# Altium PCB SensorTag.PcbDoc
Units mm, origin at the board's own origin, x right, y up, seen from the top; angles counter-clockwise.
Board outline 72.01 x 30.73 mm, 4 copper layers (Top Layer, VCC_3V3, VCC_1V2, Bottom Layer), stack 0.603 mm thick; 57 components, 52 nets, 238 pads, 130 vias.
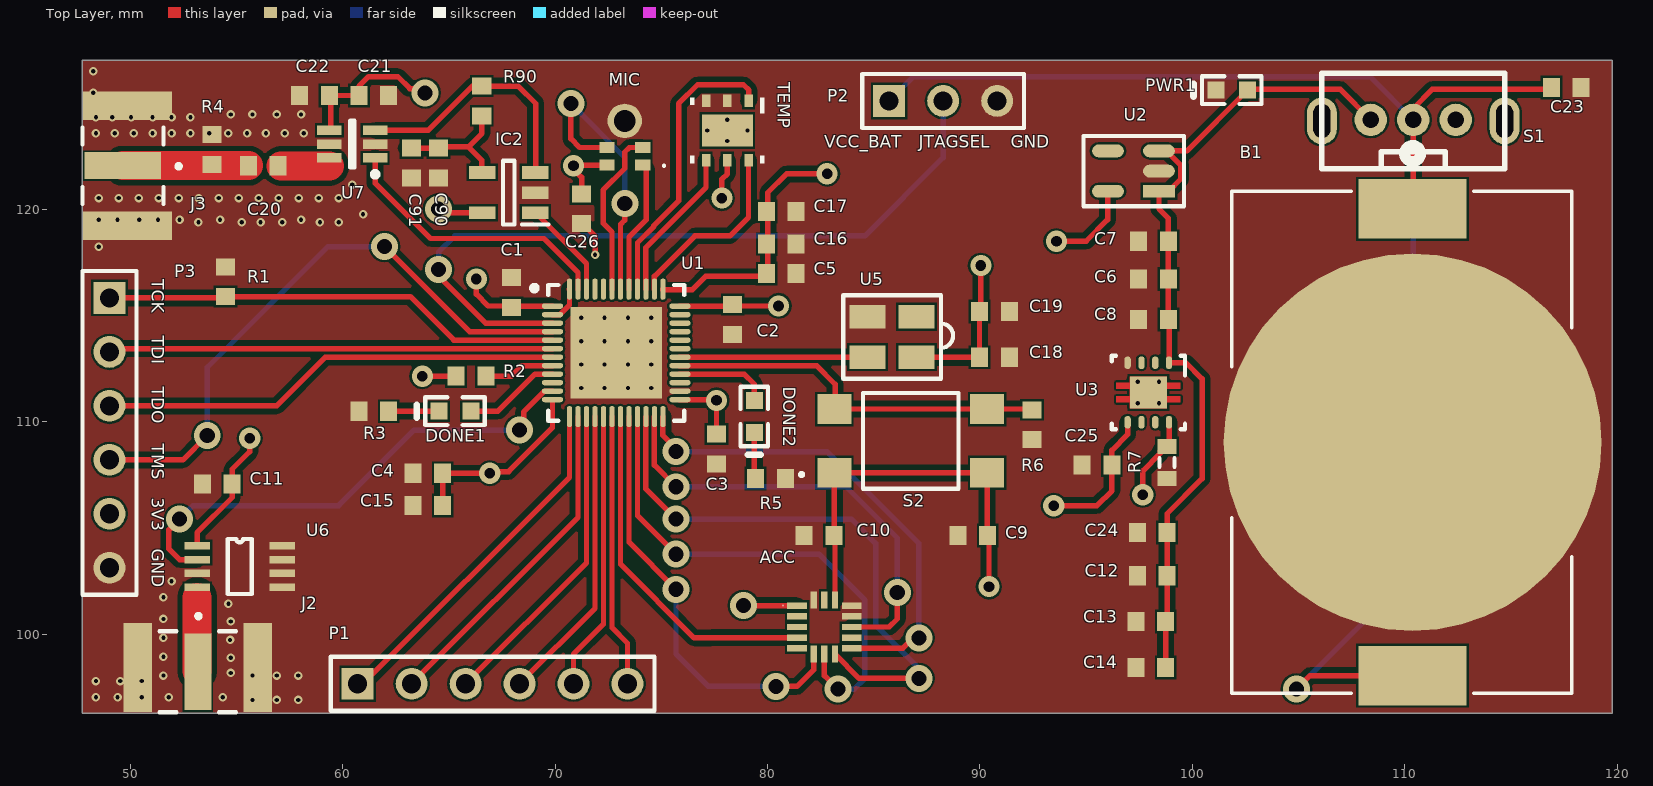
[diagram p0: Top Layer view]
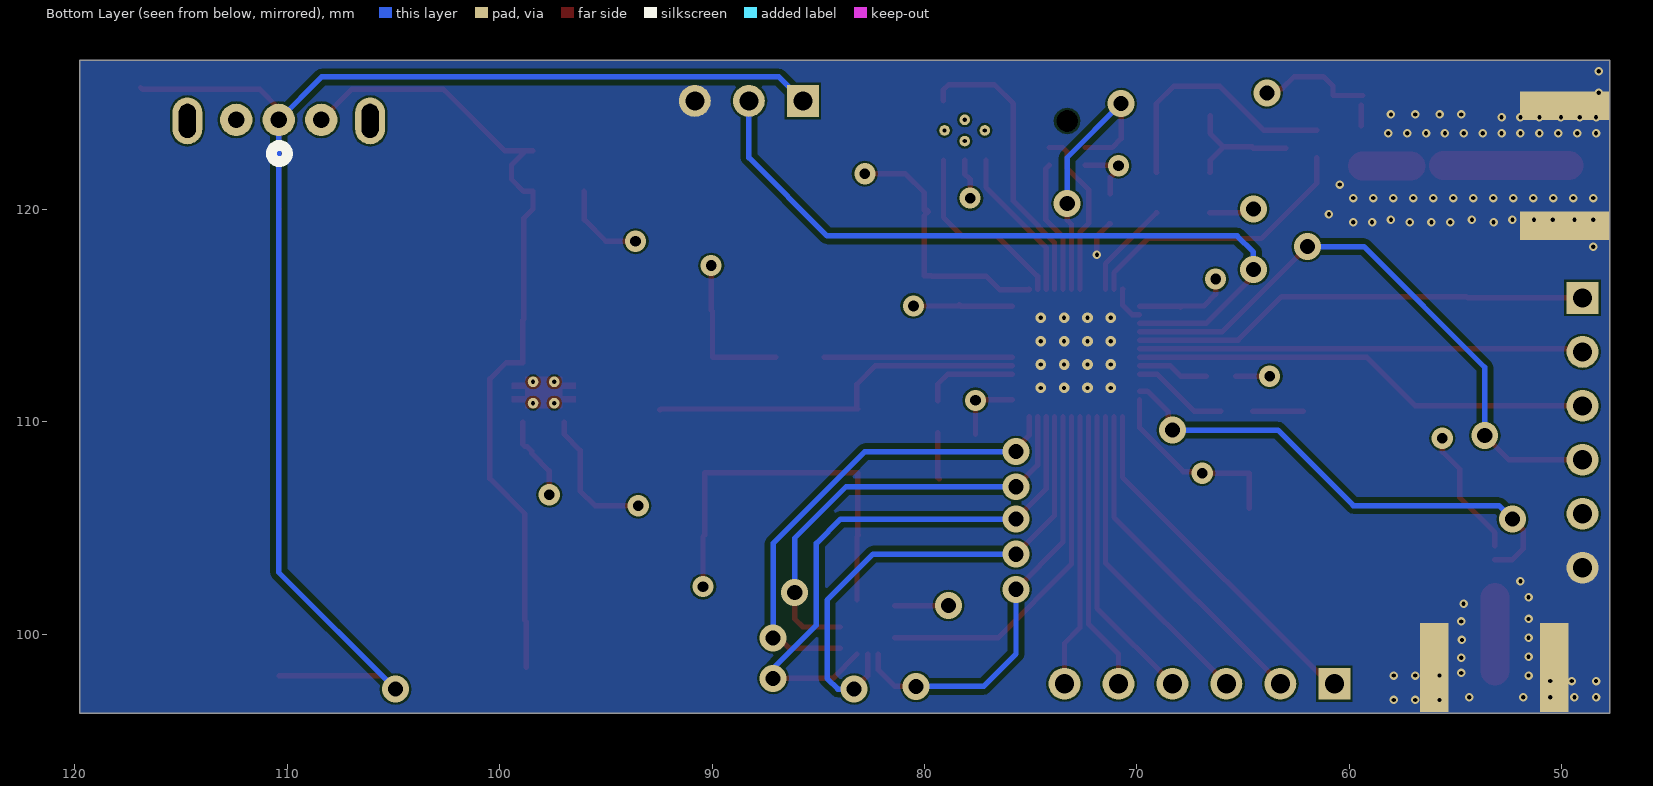
[diagram p1: Bottom Layer view, seen from below]
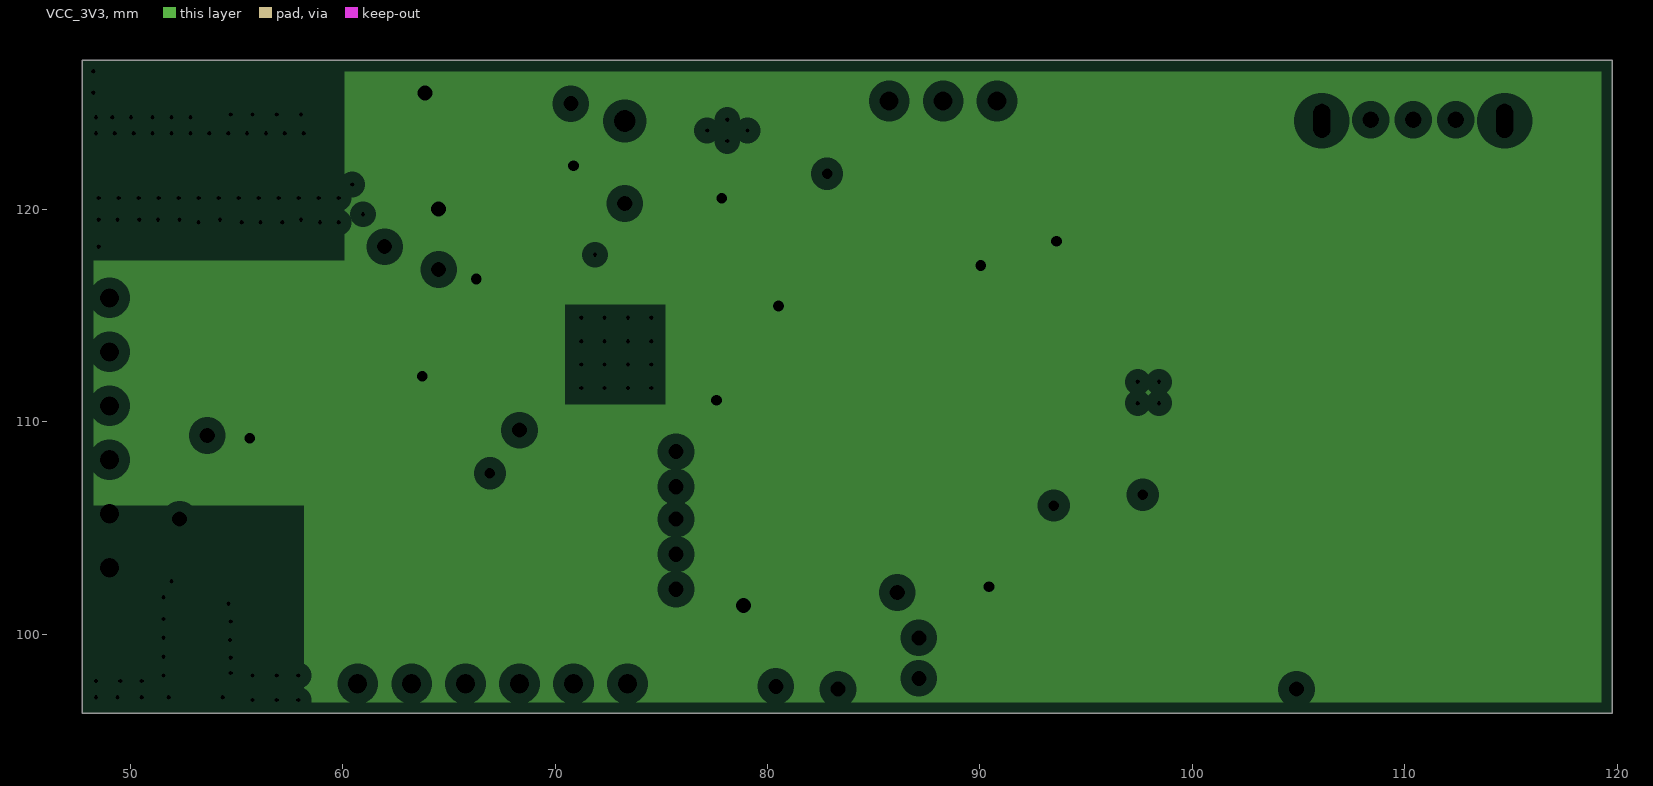
[diagram p2: VCC_3V3, clearances drawn from the general rule]
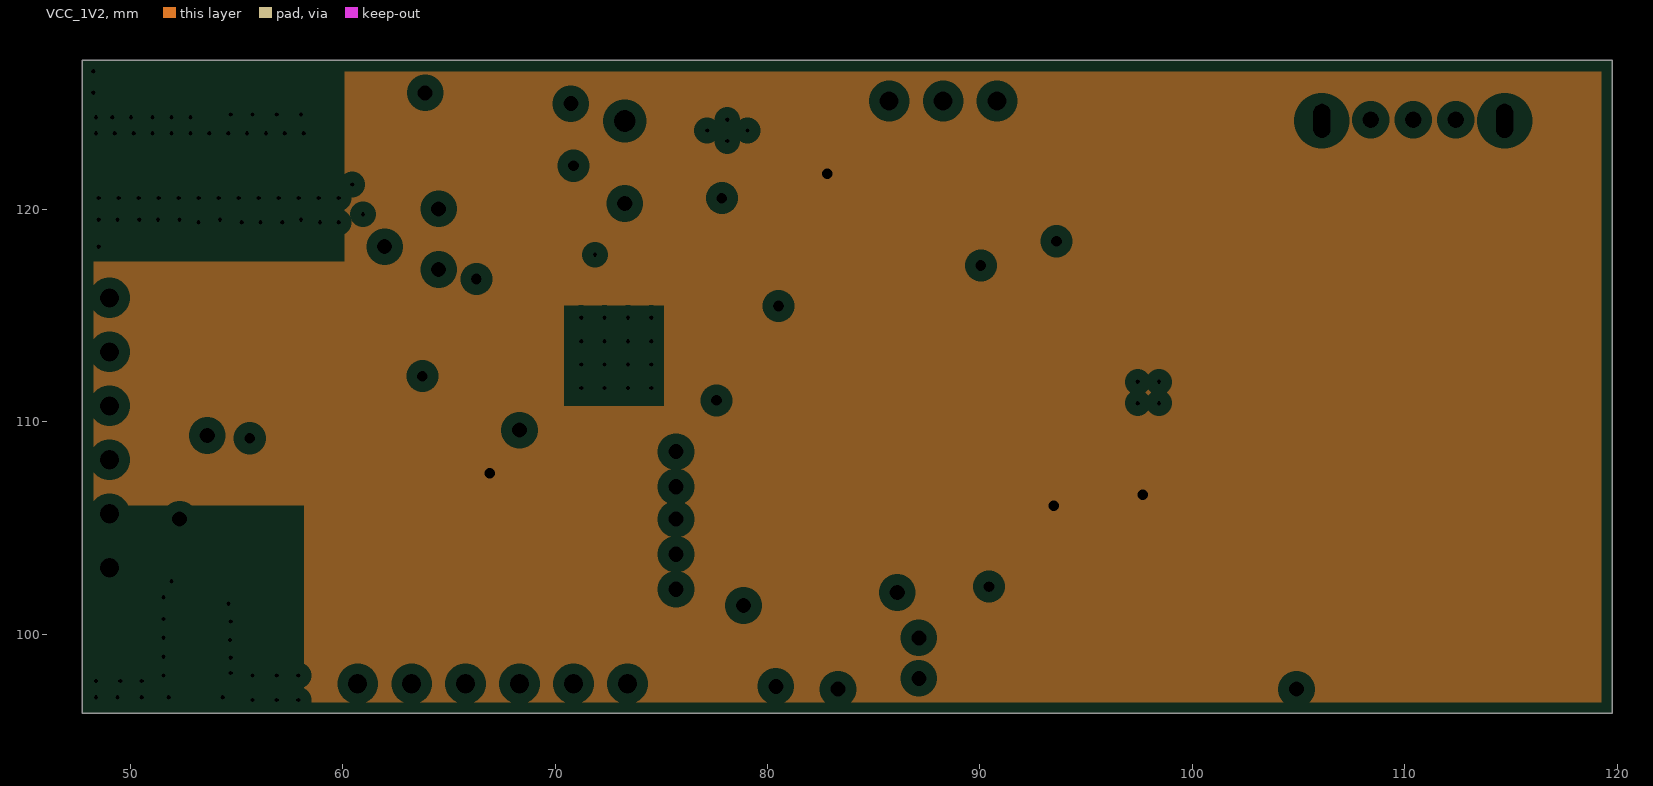
[diagram p3: VCC_1V2, clearances drawn from the general rule]

## Layer stack, top to bottom
Top Solder: solder mask 0.0102, Solder Resist, Dk 3.5
Top Layer: signal copper 0.0356
Dielectric 1: prepreg 0.0711, FR-4, Dk 4.1
VCC_3V3: plane copper 0.035, net 3V3
Dielectric 2: dielectric 0.32, FR-4, Dk 4.8
VCC_1V2: plane copper 0.035, net 1V2
Dielectric 3: prepreg 0.0711, FR-4, Dk 4.1
Bottom Layer: signal copper 0.0356
Bottom Solder: solder mask 0.0102, Solder Resist, Dk 3.5

## Board outline
47.752,127 47.752,96.266 119.761,96.266 119.761,127

## Design rules (kind name [scope] priority, off if disabled: settings)
Clearance [All] p1: gap=0.254 ignorepadtopadclearanceinfootprint=FALSE except(0: Arc-THPad Arc-Via Arc-Hole Track-SMDPad Track-Hole SMDPad-SMDPad SMDPad-Via SMDPad-Hole THPad-Via THPad-Hole Via-Via Via-Region Via-Hole Fill-Hole Poly-Text Poly-Hole Region-Region Region-Hole Text-Hole; 0.1: Arc-Poly Track-Track SMDPad-Poly THPad-Poly Via-Poly Poly-Poly Poly-Region; 0.2: SMDPad-THPad)
ComponentClearance [All] p1 off: gap=0.254 collisioncheckmode=3 verticalgap=0.254 showdistances=FALSE
PlaneClearance [All] p1: clearance=0.508
PlaneConnect [All] p1: planeconnectstyle=Direct reliefexpansion=0.508 reliefentries=4 reliefconductorwidth=0.254 reliefairgap=0.254
PolygonConnect [All] p1: connectstyle=Direct reliefconductorwidth=0.254 reliefentries=4 polygonreliefangle="90 Angle" airgapwidth=0.254
RoutingVias [All] p1: holewidth=0.711 width=1.27 viastyle="Through Hole" minholewidth=0.711 minwidth=1.27 maxholewidth=0.711 maxwidth=1.27
ShortCircuit [All] p1: allowed=TRUE
SolderMaskExpansion [All] p1: expansion=0.102 istentingtop=FALSE
Width [All] p1: maxlimit=10 minlimit=0.254 preferedwidth=0.254
26 further rules are at their usual default settings.

## Classes and differential pairs
component class power: ACC C18 C19 C20 C21 C22 C90 C91 DONE2 IC2 J2 J3 P3 R4 R5 R6 R90 S2 U5 U6 U7
component class io_bank: B1 C1 C2 C3 C4 C5 C6 C7 C8 C9 C10 C11 C12 C13 C14 C15 C16 C17 C23 C24 C25 C26 DONE1 Mic MIC P1 P2 PWR1 R1 R2 R3 R7 S1 TEMP U1 U2 U3

## Components (designator, comment, footprint, x,y, rotation, side; value= is the part's Value field where it differs from the comment)
ACC "ADXL362BCCZ-RL" ADXL362BCCZRL 82.677,100.33 r0 top (schematic designator AC1)
B1 "BK-912-TR" BK-912-TR_MPD 109.854,109.03 r270 top
C1 "0.1μF" 1608[0603] 67.945,116.078 r270 top value=100pF
C2 "0.1μF" 1608[0603] 78.359,114.808 r90 top value=100pF
C3 "0.1μF" 1608[0603] 77.597,108.712 r90 top value=100pF
C4 "4.7μF" 1608[0603] 64.008,107.569 r0 top value=100pF
C5 "4.7μF" 1608[0603] 80.645,116.967 r180 top value=100pF
C6 "10μF" 1608[0603] 98.171,116.713 r0 top value=100pF
C7 "0.1μF" 1608[0603] 98.171,118.491 r0 top value=100pF
C8 "0.01μF" 1608[0603] 98.171,114.808 r0 top value=100pF
C9 "0.01μF" 1608[0603] 89.662,104.648 r0 top value=100pF
C10 "0.1μF" 1608[0603] 82.423,104.648 r0 top value=100pF
C11 "10μF" 1608[0603] 54.102,107.061 r0 top value=100pF
C12 "10μF" 1608[0603] 98.106,102.743 r0 top value=100pF
C13 "0.1μF" 1608[0603] 98.044,100.584 r0 top value=100pF
C14 "0.01μF" 1608[0603] 98.044,98.425 r0 top value=100pF
C15 "0.1μF" 1608[0603] 64.008,106.045 r0 top value=100pF
C16 "0.01μF" 1608[0603] 80.645,118.364 r180 top value=100pF
C17 "10μF" 1608[0603] 80.645,119.888 r180 top value=100pF
C18 "0.01μF" 1608[0603] 90.678,113.03 r180 top value=100pF
C19 "0.1μF" 1608[0603] 90.678,115.189 r180 top value=100pF
C20 "1nF" 1608[0603] 56.261,122.047 r180 top
C21 "100nF" 1608[0603] 61.468,125.349 r180 top
C22 "10nF" 1608[0603] 58.674,125.349 r0 top
C23 "Cap" 1608[0603] 117.602,125.73 r180 top value=10uF
C24 "0.1μF" 1608[0603] 98.106,104.775 r0 top value=100pF
C25 "0.47μF" 1608[0603] 95.504,107.95 r0 top value=100pF
C26 "0.1μF" 1608[0603] 71.247,120.015 r90 top value=100pF
C90 "1nF" 1608[0603] 64.516,122.174 r270 top value=1pF
C91 "1nF" 1608[0603] 63.246,122.174 r270 top value=1pF
DONE1 "绿灯 0603" 0603_LED 65.29,110.49 r0 top
DONE2 "绿灯 0603" 0603_LED 79.375,110.236 r90 top
IC2 "NCS2200SN2T1G" SOT95P275X110-5N 67.818,120.777 r180 top
J2 "SMA-J-P-H-ST-EM1" SAMTEC_SMA-J-P-H-ST-EM1 53.182,98.225 r0 top
J3 "SMA-J-P-H-ST-EM1" SAMTEC_SMA-J-P-H-ST-EM1 49.657,122.047 r270 top
MIC "MMICT3902-00-012" MMICT390200012 73.279,123.444 r90 top (schematic designator IC1)
P1 "Header 6" HDR1X6 60.706,97.663 r0 top
P2 "Header 3" HDR1X3 85.725,125.095 r0 top
P3 "Header 6" HDR1X6 49.022,115.824 r270 top
PWR1 "红灯 0603" 0603_LED 101.854,125.603 r0 top
R1 "4.7k" 1608[0603] 54.483,116.586 r270 top value=1K
R2 "4.7k" 1608[0603] 66.04,112.141 r0 top value=1K
R3 "1k Ohm" 1608[0603] 61.468,110.49 r0 top value=1k
R4 "47 Ohm" 1608[0603] 53.848,122.809 r270 top value=47O
R5 "1k Ohm" 1608[0603] 80.137,107.315 r180 top value=1k
R6 "1k Ohm" 1608[0603] 92.456,109.855 r90 top value=1M
R7 "Res3" J1-0603 98.806,108.077 r270 top value=1M
R90 "47 Ohm" 1608[0603] 66.548,125.095 r90 top value=1MO
S1 "SW-SPDT" SW_SPDT 110.395,124.206 r180 top
S2 "TL3305AF160QG" TL3305AF160QG 86.741,109.093 r0 top
TEMP "HDC2080DMBR" DMB0006A 78.105,123.706 r270 top value=Value (schematic designator U4)
U1 "GW1N-LV4QN48C6" QFN40P600X600X60_HS-49N 72.876,113.236 r0 top
U2 "TPS73633" TPS73633 98.425,120.843 r180 top
U3 "TPS715A01DRBR" DRB0008A 97.925,111.371 r270 top
U5 "ASTX_H11_20MHz" ASTX_H11 87.009,114.935 r270 top
U6 "adg902" ADG902 53.15,104.155 r0 top
U7 "LT5534" LT5534 60.452,123.063 r180 top

## Footprints (in the part's own frame and the unit in brackets; to place one, negate y for a bottom-side part, rotate by r counter-clockwise, add the part's x,y. Pads: shape width x height; smd on the part's side, far side on the other; paste and mask are expansions set on the pad)
0603_LED [mm]
  rect 0.8x0.8 smd: A(0.75,0) K(-0.75,0)
  silkscreen extent -1.8,-0.65 1.4,0.65
1608[0603] [mm] "Chip Capacitor, Body 1.6x0.8mm, IPC High Density"
  rect 0.8x0.9 smd: 1(-0.7,0) 2(0.7,0)
  body extent -0.87,-0.48 0.87,0.48, height 1.3
ADG902 [mm]
  rect 1.2x0.35 smd: 1(0,0) 2(0,-0.65) 3(0,-1.3) 4(0,-1.95) 5(4,-1.95) 6(4,-1.3) 7(4,-0.65) 8(4,0)
  silkscreen extent 1.43,-2.28 2.57,0.33
ADXL362BCCZRL [mm]
  rect 0.925x0.3 smd: 1(-1.288,1) 2(-1.288,0.5) 3(-1.288,0) 4(-1.288,-0.5) 5(-1.288,-1) 9(1.288,-1) 10(1.288,-0.5) 11(1.288,0) 12(1.288,0.5) 13(1.288,1)
  rect 0.3x0.8 smd: 6(-0.5,-1.275) 7(0,-1.275) 8(0.5,-1.275) 14(0.5,1.275) 15(0,1.275) 16(-0.5,1.275)
  silkscreen extent -1.97,1.01 -1.94,1.03, body extent -1.72,-1.65 1.72,1.65, height 1.24
ASTX_H11 [mm]
  rect 1.1x1.7 smd: 1(0,0) 2(0,-2.3) 3(1.9,-2.3) 4(1.9,0)
  silkscreen extent -1.02,-3.45 2.92,1.72
BK-912-TR_MPD [mm]
  rect 2.794x5.08 smd paste+0 mask+0: 1(-10.985,0.509) 2(10.985,0.509)
  round 17.78 smd: 3(0,0.509)
  silkscreen extent -13.97,-8 11.81,8, body extent 0,0 0.25,0.25, height 0.25
DMB0006A [mm]
  rect 0.6x0.4 smd paste+0 mask+0: 1(-1.4,1) 2(-1.4,0) 3(-1.4,-1) 4(1.4,-1) 5(1.4,0) 6(1.4,1)
  rect 1.5x2.4 smd paste-1.187 mask+0: 7(0,0)
  round 0.5 hole 0.203 mask+0: V(-0.5,0) V(0,0.95) V(0,-0.95) V(0.5,0)
  silkscreen extent -1.55,-1.75 1.55,1.75, body extent 0,0 0.25,0.25, height 0.25
DRB0008A [mm]
  oval 0.6x0.3 smd paste+0 mask+0.051: 1(-1.4,0.975) 2(-1.4,0.325) 3(-1.4,-0.325) 4(-1.4,-0.975) 5(1.4,-0.975) 6(1.4,-0.325) 7(1.4,0.325) 8(1.4,0.975)
  rect 1.5x1.75 smd paste-0.862 mask+0.051: 9(0,0)
  round 0.5 hole 0.203 mask+0.051: V(-0.5,0.5) V(-0.5,-0.5) V(0.5,0.5) V(0.5,-0.5)
  Top Layer region: -0.185,-1.5 -0.465,-1.5 -0.465,-0.875 -0.75,-0.875 -0.75,0.875 -0.465,0.875 -0.465,1.5 -0.185,1.5 -0.185,0.875 0.185,0.875 0.185,1.5 0.465,1.5 0.465,0.875 0.75,0.875 0.75,-0.875 0.465,-0.875 0.465,-1.5 0.185,-1.5 0.185,-0.875 -0.185,-0.875
  silkscreen extent -1.73,-1.73 1.73,1.73, body extent 0,0 0.25,0.25, height 0.25
HDR1X3 [mm] "Connector; Header; 3 Position"
  rect 1.5x1.5 hole 0.9: 1(0,0)
  round 1.5 hole 0.9: 2(2.54,0) 3(5.08,0)
  silkscreen extent -1.27,-1.27 6.35,1.27
HDR1X6 [mm] "Connector; Header; 6 Position"
  rect 1.5x1.5 hole 0.9: 1(0,0)
  round 1.5 hole 0.9: 2(2.54,0) 3(5.08,0) 4(7.62,0) 5(10.16,0) 6(12.7,0)
  silkscreen extent -1.27,-1.27 13.97,1.27
J1-0603 [mm] "Chip Resistor, Body 1.6x0.8mm, IPC High Density"
  rect 0.7x0.9 smd: 1(-0.75,0) 2(0.75,0)
  silkscreen extent -0.2,-0.35 0.2,0.35, body extent -0.85,-0.48 0.85,0.48, height 0.9
LT5534 [mm] "SOT23, 6-Leads, Body 2.00x2.55mm, Pitch 0.65mm, IPC Medium Density"
  rect 1.15x0.45 smd: 1(-1.075,0.65) 2(-1.075,0) 3(-1.075,-0.65) 4(1.075,-0.65) 5(1.075,0) 6(1.075,0.65)
  silkscreen extent -1.2,-1.1 0.1,1.55, body extent -0.67,-1.1 0.67,1.1, height 1.1
MMICT390200012 [mm]
  rect 0.522x0.725 smd: 1(-1.364,-0.838) 2(-0.542,-0.838) 4(-0.542,0.837) 5(-1.364,0.837)
  round 1.625 smd: 3(0.71,0)
  round 0.512 hole 1.025 unplated: 6(0.71,0)
  silkscreen extent -1.45,-1.9 -1.35,-1.8, body extent -1.75,-1.33 1.75,1.33, height 1.23
QFN40P600X600X60_HS-49N [mm] "QFN, 48-Leads, Body 6.00x6.00mm, Pitch 0.40mm, Thermal Pad 4.63x4.63mm, IPC Medium Density"
  oval 1x0.25 smd: 1(-3,2.2) 2(-3,1.8) 3(-3,1.4) 4(-3,1) 5(-3,0.6) 6(-3,0.2) 7(-3,-0.2) 8(-3,-0.6) 9(-3,-1) 10(-3,-1.4) 11(-3,-1.8) 12(-3,-2.2) 25(3,-2.2) 26(3,-1.8) 27(3,-1.4) 28(3,-1) 29(3,-0.6) 30(3,-0.2) 31(3,0.2) 32(3,0.6) 33(3,1) 34(3,1.4) 35(3,1.8) 36(3,2.2)
  oval 0.25x1 smd: 13(-2.2,-3) 14(-1.8,-3) 15(-1.4,-3) 16(-1,-3) 17(-0.6,-3) 18(-0.2,-3) 19(0.2,-3) 20(0.6,-3) 21(1,-3) 22(1.4,-3) 23(1.8,-3) 24(2.2,-3) 37(2.2,3) 38(1.8,3) 39(1.4,3) 40(1,3) 41(0.6,3) 42(0.2,3) 43(-0.2,3) 44(-0.6,3) 45(-1,3) 46(-1.4,3) 47(-1.8,3) 48(-2.2,3)
  rect 4.3x4.3 smd: 49(0,0)
  silkscreen extent -3.97,-3.2 3.2,3.2, body extent -3.05,-3.05 3.05,3.05, height 0.6
SAMTEC_SMA-J-P-H-ST-EM1 [mm]
  rect 1.27x3.6 smd: 1(0,0)
  rect 1.35x4.2 smd: 2_1(-2.825,0.2) 3_1(2.825,0.2)
  rect 1.35x4.2 smd far side: 2_2(-2.825,0.2) 3_2(2.825,0.2)
  silkscreen extent -1.8,-1.9 1.8,2.72
SOT95P275X110-5N [mm]
  rect 1.25x0.6 smd: 1(-1.25,0.95) 2(-1.25,0) 3(-1.25,-0.95) 4(1.25,-0.95) 5(1.25,0.95)
  silkscreen extent -1.88,-1.5 0.28,1.5, body extent -1.38,-1.5 1.38,1.5, height 1.1
SW_SPDT [mm]
  oval 1.4x2.2 hole 0.8 slot 1.6 at 90 deg: 0(-4.3,0.05) 0(4.3,0.05)
  round 1.524 hole 0.762: 1(-2,0) 2(0,0) 3(2,0)
  silkscreen extent -4.3,-2.2 4.3,2.3, body extent -4.25,-1.9 4.25,1.8, height 6.5
TL3305AF160QG [mm]
  rect 1.6x1.4 smd: 1(-3.6,-1.5) 2(3.6,-1.5) 3(-3.6,1.5) 4(3.6,1.5)
  silkscreen extent -5.21,-2.25 2.25,2.25
TPS73633 [mm]
  rect 1.5x0.6 smd: 1(0,0)
  oval 1.5x0.6 smd: 2(0,-0.95) 3(0,-1.9) 4(2.4,-1.9) 5(2.4,0)
  silkscreen extent -1.17,-2.6 3.55,0.7

## Part data
ACC: "Accelerometer", Manufacturer_Name="Analog Devices", Mouser2 Part Number=584-ADXL362BCCZ-R, Datasheet Link=https://componentsearchengine.com//ADXL362BCCZ-RL.pdf, Height=1.14mm, Manufacturer_Part_Number=ADXL362BCCZ-RL, Mouser2 Price/Stock=https://www.mouser.com/Search/Refine.aspx?Keyword=584-ADXL362BCCZ-R
B1: "No Description Available", VALUE_2=Value, Built_By=EMA_Cory, Copyright="Copyright (C) 2018 Accelerated Designs. All rights reserved", Datasheet=https://www.memoryprotectiondevices.com/datasheets/BK-912-datasheet.pdf, Manufacturer_Part_Number=BK-912-TR, RefDes=RefDes, SourceLibrary=Memory_Protection_Devices_2020-01-22, Type=DEV, Vendor="Memory Protection Devices, Inc"
C1 C2 C3 C4 C5 C7 C10 C13 C15 C19 C24 C25 C26: library part CAP_2, "MLCCs", LatestRevisionDate=17-Jul-2002, LatestRevisionNote="Re-released for DXP Platform.", PackageDescription="Radial Cap, Thru-Hole; 2 Leads; 0.3 in Pin Spacing", PackageReference=RAD-0.3, Published=8-Jun-2000, Publisher="Altium Limited"
C6 C11 C12 C17: library part CAP_4, "MLCCs", LatestRevisionDate=17-Jul-2002, LatestRevisionNote="Re-released for DXP Platform.", PackageDescription="Radial Cap, Thru-Hole; 2 Leads; 0.3 in Pin Spacing", PackageReference=RAD-0.3, Published=8-Jun-2000, Publisher="Altium Limited"
C8 C9 C14 C16 C18: library part CAP_3, "MLCCs", LatestRevisionDate=17-Jul-2002, LatestRevisionNote="Re-released for DXP Platform.", PackageDescription="Radial Cap, Thru-Hole; 2 Leads; 0.3 in Pin Spacing", PackageReference=RAD-0.3, Published=8-Jun-2000, Publisher="Altium Limited"
C20 C21 C22 C90 C91: library part Cap, "Ceramic Capacitor (Surface Mount)", Manufacturer="Generic Ceramic Chip Cap (TBD)"
C23: "Capacitor", LatestRevisionDate=17-Jul-2002, LatestRevisionNote="Re-released for DXP Platform.", PackageDescription="Radial Cap, Thru-Hole; 2 Leads; 0.3 in Pin Spacing", PackageReference=RAD-0.3, Published=8-Jun-2000, Publisher="Altium Limited"
DONE1 DONE2: library part "0603 绿灯", "发光二极管", Package=0603, SuppliersPartNumber=C72043, ComponentLink1Description=供应商链接, ComponentLink1URL=http://www.szlcsc.com/product/details_73152.html, Supplier=LC
IC2: "Integrated Circuit", Manufacturer_Name="ON Semiconductor", Datasheet Link=http://www.onsemi.com/pub/Collateral/NCS2200-D.PDF, Height=1.1mm, Manufacturer_Part_Number=NCS2200SN2T1G
J2 J3: "SMA Connector Jack, Female Socket 50Ohm Board Edge, End Launch Solder", Package=None, Digi-Key_Part_Number=SAM8857-ND, MF=Samtec, MP=SMA-J-P-H-ST-EM1, SnapEDA_Link=https://www.snapeda.com/parts/SMA-J-P-H-ST-EM1/Samtec%20Inc./view-part/134500/?ref=snap, Toby_UK-Purchase-URL=https://snapeda.com/shop?store=Toby+UK&id=134500
MIC: "Integrated Circuit", Manufacturer_Name=TDK, Datasheet Link=http://invensense.tdk.com/wp-content/uploads/2020/05/DS-000357-T3902-v1.0.pdf, Height=1.13mm, Manufacturer_Part_Number=MMICT3902-00-012
P1 P3: "Header, 6-Pin", LatestRevisionDate=17-Jul-2002, LatestRevisionNote="Re-released for DXP Platform.", Publisher="Altium Limited"
P2: "Header, 3-Pin", LatestRevisionDate=17-Jul-2002, LatestRevisionNote="Re-released for DXP Platform.", Publisher="Altium Limited"
PWR1: library part "0603 红灯", "发光二极管", Package=0603, SuppliersPartNumber=C2286, ComponentLink1Description=供应商链接, ComponentLink1URL=http://www.szlcsc.com/product/details_2659.html, Supplier=LC
R1 R2: library part RES_1, "Resistor", LatestRevisionDate=17-Jul-2002, LatestRevisionNote="Re-released for DXP Platform.", PackageDescription="Axial Device, Thru-Hole; 2 Leads; 0.3 in Pin Spacing", PackageReference=AXIAL-0.3, Published=8-Jun-2000, Publisher="Altium Limited"
R3 R4 R5 R6 R90: library part Res, "Chip Resistor (Surface Mount)", Manufacturer="Generic Chip Res (TBD)"
R7: "Resistor", LatestRevisionDate=29-May-2009, LatestRevisionNote="IPC-7351 Footprint Added.", PackageDescription="Chip Resistor", PackageReference=J1-0603, Published=8-Jun-2000, Publisher="Altium Limited"
S1: "Single Pole Double Throw Subminiature Toggle Switch, Right Angle Mounting, Vertical Actuation", ComponentLink1Description="Manufacturer Link", ComponentLink1URL=http://www.apem.com, DatasheetDocument=05-Dec-2000, LatestRevisionDate=17-Dec-2003, LatestRevisionNote="Schematic revised, PCB Footprint replaced.", PackageReference=TL36WW15050, Published=24-Mar-1999, Publisher="Altium Limited"
S2: "Switch", Manufacturer_Name=E-Switch, Mouser2 Part Number=612-TL3305AF160QG, Datasheet Link=https://componentsearchengine.com//TL3305AF160QG.pdf, Manufacturer_Part_Number=TL3305AF160QG, Mouser2 Price/Stock=https://www.mouser.com/Search/Refine.aspx?Keyword=612-TL3305AF160QG
TEMP: "No Description Available", Manufacturer="Texas Instruments", Copyright="Copyright (C) 2018 Accelerated Designs. All rights reserved", PartNumber=HDC2080DMBR, RefDes=RefDes, Type=DEV
U3: "No Description Available", Alternate_PartNumber=TPS715A01DRBT, Manufacturer="Texas Instruments", CompType=IC, Copyright="Copyright (C) 2021 Ultra Librarian. All rights reserved.", Manufacturer_Part_Number=TPS715A01DRBR, Mfr_Name="Texas Instruments", MountType=SMT, PackageReference=DRB0008A, PartNumber=TPS715A01DRBR, RefDes=RefDes, RoHS=Y, Type=DEV
U7: library part LT55534

## Via types
v1: diameter 0.4, hole 0.2, Top Layer to Bottom Layer, 79 vias
v2: diameter 1.27, hole 0.711, Top Layer to Bottom Layer, 21 vias
v3: diameter 0.5, hole 0.2, Top Layer to Bottom Layer, 16 vias
v4: diameter 1, hole 0.5, Top Layer to Bottom Layer, 14 vias

## Nets (pads, with @x,y where several pads share a name; then routed paths per layer and width w, separated by ;. In a path a pad name is that pad's centre, name@x,y a point inside that pad or via, vN(x,y) a via of type N, cw(c..) or ccw(c..) an arc to the next point about the centre after c; other vN are vias at no path point)
1V2: C4.2 C5.2 C15.2 C16.2 C17.2 C25.2 R7.1 U1.12 U1.37 U3.5 U3.8 | length 32.1
  Top Layer w0.254: C15.2@64.708,105.918 C15.2 C4.2 v4(66.929,107.569) 67.008,107.648 67.81,107.648 69.876,109.714 U1.12 ; U1.37 75.076,116.207 75.078,116.205 76.454,116.205 77.089,116.84 79.655,116.84 79.686,116.871 79.94,116.859 80.01,116.855 80.01,119.696 79.818,119.888 C17.2@79.881,119.951 ; C17.2 80.01,119.953 80.01,120.777 80.899,121.666 v4(82.804,121.666) ; v4(93.472,106.045) 95.504,106.045 96.204,106.745 C25.2 96.204,108.65 96.95,109.396 U3.5 ; v4(97.663,106.553) 97.663,107.684 98.483,108.504 98.483,108.604 98.706,108.827 R7.1 98.9,108.921 U3.8
3V3: ACC.1 ACC.14 C1.2 C2.2 C3.2 C9.2 C10.2 C11.2 C18.2 C19.2 C21.2 C22.2 C26.2 IC2.5 MIC.5 P3.5 R2.1 S2.1 S2.2 TEMP.5 U1.1 U1.25 U1.36 U2.5 U5.4 U6.1 U7.4 | length 66.5
  Top Layer w0.254: U6.1 53.15,104.781 54.802,106.433 C11.2 54.802,107.761 55.626,108.585 v4(55.626,109.22) ; C22.2 C21.2 60.768,125.792 61.214,126.238 62.592,126.238 63.16,125.67 63.687,125.67 v2(63.881,125.476) ; U7.4@59.436,123.931 C22.2@59.436,124.906 ; v4(63.754,112.141) R2.1 ; v2(64.516,120.015) 64.704,119.827 IC2.5 ; v4(66.294,116.713) 66.294,115.999 66.85,115.443 67.88,115.443 C1.2 68.003,115.436 U1.1 ; v4@70.833,122.014 v4(70.866,122.047) ; C26.2 71.247,121.496 70.866,121.877 v4(70.866,122.047) ; MIC.5 72.425,122.063 70.882,122.063 v4(70.866,122.047) ; U1.25 75.878,111.034 77.561,111.034 v4(77.597,110.998) C3.2 ; U1.36 78.287,115.436 C2.2 78.424,115.443 v4(80.518,115.443) ; v4(77.851,120.523) 77.851,121.412 78.105,121.666 TEMP.5 ; v2(78.867,101.346) 78.875,101.338 81.381,101.338 ACC.1 ; ACC.14 83.177,104.594 C10.2 83.141,104.666 S2.1 S2.2 90.341,104.669 C9.2 90.424,104.586 v4(90.424,102.235) ; U5.4 87.014,113.03 C18.2 C19.2 90.043,115.254 v4(90.043,117.348) ; v4(93.599,118.491) 94.996,118.491 96.012,119.507 96.012,120.83 U2.5
GND: ACC.12 ACC.13 ACC.16 B1.3 C1.1 C2.1 C3.1 C4.1 C5.1 C6.1 C7.1 C8.1 C9.1 C10.1 C11.1 C12.1 C13.1 C14.1 C15.1 C16.1 C17.1 C18.1 C19.1 C21.1 C22.1 C23.1 C24.1 C25.1 C26.1 C90.2 C91.2 IC2.2 J2.2_1 J2.2_2 J2.3_1 J2.3_2 J3.2_1 J3.2_2 J3.3_1 J3.3_2 MIC.3 P2.3 P3.6 PWR1.K R1.1 R3.1 R4.1 R5.1 R6.1 R7.2 TEMP.2 TEMP.3 U1.2 U1.26 U1.48 U1.49 U2.2 U3.4 U5.2 U6.3 U6.5 U6.6 U6.7 U6.8 U7.2 U7.5 | length 3.5
  Top Layer w0.254: U1.2 70.224,115.036 70.676,115.488 U1.48 U1.48@70.674,116.238 ; C26.1 71.297,119.315 71.882,118.73 v1(71.882,117.856)
  other v1: 55.754,96.901 56.897,96.901 57.913,96.901 48.387,97.028 49.403,97.028 50.546,97.028 51.816,97.028 54.356,97.028 48.387,97.79 49.53,97.79 50.546,97.79 51.562,98.044 55.754,98.044 56.897,98.044 57.913,98.044 54.737,98.171 54.728,98.886 51.562,98.933 54.702,99.721 51.562,99.822 54.728,100.595 51.562,100.711 54.622,101.43 51.562,101.727 51.943,102.489 48.515,118.237 53.213,119.38 55.245,119.38 56.134,119.38 57.15,119.38 58.928,119.38 59.817,119.38 48.514,119.507 49.403,119.507 50.419,119.507 51.308,119.507 52.324,119.507 54.229,119.507 58.039,119.507 60.96,119.761 48.514,120.523 49.456,120.523 50.398,120.523 51.34,120.523 52.282,120.523 53.224,120.523 54.165,120.523 55.107,120.523 56.049,120.523 56.991,120.523 57.933,120.523 58.875,120.523 59.817,120.523 60.452,121.158 48.387,123.571 49.276,123.571 50.165,123.571 51.054,123.571 51.943,123.571 52.832,123.571 53.721,123.571 54.61,123.571 55.499,123.571 56.388,123.571 57.277,123.571 58.166,123.571 48.387,124.333 49.149,124.333 50.038,124.333 51.054,124.333 51.943,124.333 52.832,124.333 54.737,124.46 55.753,124.46 56.896,124.46 58.039,124.46 48.261,125.476 48.261,126.492
  other v3: 71.226,111.586 72.326,111.586 73.426,111.586 74.526,111.586 71.226,112.686 72.326,112.686 73.426,112.686 74.526,112.686 71.226,113.786 72.326,113.786 73.426,113.786 74.526,113.786 71.226,114.886 72.326,114.886 73.426,114.886 74.526,114.886
JTAGSEL3N: P2.2 U1.3 | length 35.7
  Top Layer w0.254: v2(64.516,117.161) 64.516,116.847 66.727,114.636 U1.3
  Bottom Layer w0.254: v2(64.516,117.161) 64.516,117.983 65.278,118.745 84.582,118.745 88.265,122.428 P2.2
NetC20_1: C20.1 U7.6 | length 2.3
  Top Layer w0.254: C20.1@57.088,122.047 C20.1@57.103,122.032
  Top Layer w1.37: C20.1@57.103,122.032 59.377,122.032
NetC20_2: C20.2 J3.1 R4.2 | length 6
  Top Layer w0.254: C20.2@55.626,122.109 C20.2@55.688,122.047
  Top Layer w1.37: J3.1 C20.2
NetC90_1: C90.1 C91.1 IC2.4 R90.1 | length 6.1
  Top Layer w0.254: C91.1@62.992,122.874 C91.1 C90.1 64.578,122.936 65.913,122.936 ; R90.1 66.548,123.571 65.913,122.936 ; IC2.4 66.548,121.747 66.548,122.301 65.913,122.936
NetDONE1_A: DONE1.A U1.9 | length 4.6
  Top Layer w0.254: DONE1.A 67.31,110.49 69.056,112.236 U1.9
NetDONE1_K: DONE1.K R3.2 | length 2.4
  Top Layer w0.254: R3.2 DONE1.K
NetDONE2_K: DONE2.K R5.2 | length 2.2
  Top Layer w0.254: R5.2@79.31,107.315 79.375,107.38 DONE2.K
NetIC2_3: IC2.3 R90.2 U7.3 | length 12
  Top Layer w0.254: U7.3 64.023,123.713 66.105,125.795 R90.2 68.261,125.795 69.088,124.968 69.088,121.747 IC2.3
NetJ2_1: J2.1 U6.4 | length 3.5
  Top Layer w0.254: J2.1@53.15,98.257 J2.1
  Top Layer w1.37: J2.1@53.15,98.257 53.15,101.727
NetR2_2: R2.2 U1.8 | length 3.3
  Top Layer w0.254: R2.2 67.945,112.141 68.44,112.636 U1.8
PIN10: U1.10
PIN11: U1.11 U6.2 | length 23.6
  Top Layer w0.254: v2(52.324,105.41) 51.816,104.902 51.816,104.013 52.324,103.505 U6.2 ; v2(68.326,109.601) 68.52,109.795 68.52,110.451 69.505,111.436 U1.11
  Bottom Layer w0.254: v2(52.324,105.41) 52.959,106.045 59.807,106.045 63.363,109.601 v2(68.326,109.601)
PIN13: P1.1 U1.13 | length 16.9
  Top Layer w0.254: P1.1 60.96,97.663 70.676,107.379 U1.13
PIN14: P1.2 U1.14 | length 15.8
  Top Layer w0.254: P1.2 71.076,105.493 U1.14
PIN15: P1.3 U1.15 | length 14.9
  Top Layer w0.254: P1.3 71.476,103.353 U1.15
PIN16: P1.4 U1.16 | length 14
  Top Layer w0.254: P1.4 71.876,101.213 U1.16
PIN17: P1.5 U1.17 | length 13.2
  Top Layer w0.254: P1.5 70.866,99.06 72.276,100.47 U1.17
PIN18: P1.6 U1.18 | length 12.9
  Top Layer w0.254: U1.18 72.676,100.298 73.406,99.568 P1.6
PIN19: ACC.4 U1.19 | length 16.7
  Top Layer w0.254: U1.19 73.076,103.287 76.541,99.822 77.343,99.822 77.351,99.83 ACC.4
PIN20: ACC.6 U1.20 | length 20.3
  Top Layer w0.254: U1.20 73.476,104.324 v2(75.692,102.108) ; v2(80.391,97.536) 81.385,97.536 82.177,98.328 ACC.6
  Bottom Layer w0.254: v2(75.692,102.108) 75.692,99.06 77.216,97.536 v2(80.391,97.536)
PIN21: ACC.7 U1.21 | length 24.1
  Top Layer w0.254: U1.21 73.876,105.575 v2(75.692,103.759) ; ACC.7 82.677,98.044 v2(83.312,97.409)
  Bottom Layer w0.254: v2(75.692,103.759) 82.423,103.759 84.582,101.6 84.582,97.917 84.074,97.409 v2(83.312,97.409)
PIN22: ACC.8 U1.22 | length 26.9
  Top Layer w0.254: U1.22 74.276,106.826 v2(75.692,105.41) ; ACC.8 84.315,97.917 v2(87.122,97.917)
  Bottom Layer w0.254: v2(75.692,105.41) 83.947,105.41 85.09,104.267 85.09,100.417 87.122,98.385 v2(87.122,97.917)
PIN23: ACC.11 U1.23 | length 21.2
  Top Layer w0.254: U1.23 74.676,107.95 v2(75.692,106.934) ; ACC.11 85.725,100.33 86.106,100.711 v2(86.106,101.957)
  Bottom Layer w0.254: v2(75.692,106.934) 83.693,106.934 86.106,104.521 v2(86.106,101.957)
PIN24: ACC.9 U1.24 | length 22.9
  Top Layer w0.254: U1.24 75.076,109.355 75.692,108.739 v2(75.692,108.585) ; ACC.9 86.355,99.33 86.847,99.822 v2(87.122,99.822)
  Bottom Layer w0.254: v2(75.692,108.585) 82.804,108.585 87.122,104.267 v2(87.122,99.822)
PIN27: U1.27
PIN28: DONE2.A U1.28 | length 4.5
  Top Layer w0.254: U1.28 78.899,112.236 79.375,111.76 DONE2.A
PIN29: R6.2 S2.3 S2.4 U1.29 | length 18.2
  Top Layer w0.254: U1.29 82.309,112.636 83.185,111.76 83.185,110.637 S2.3 S2.4 92.418,110.593 R6.2
PIN30: U1.30 U5.3 | length 8.8
  Top Layer w0.254: U1.30 U5.3 U5.3
PIN31: U1.31
PIN32: U1.32
PIN33: U1.33
PIN34: U1.34
PIN35: U1.35
PIN38: TEMP.6 U1.38 | length 8.9
  Top Layer w0.254: U1.38 74.676,116.84 76.581,118.745 78.232,118.745 79.105,119.618 TEMP.6
PIN39: TEMP.4 U1.39 | length 7.2
  Top Layer w0.254: U1.39 74.276,118.194 77.105,121.023 TEMP.4
PIN40: TEMP.1 U1.40 | length 13.8
  Top Layer w0.254: U1.40@73.878,116.238 U1.40 73.876,118.421 74.649,119.194 74.649,119.226 75.819,120.396 75.819,124.968 76.708,125.857 78.867,125.857 79.121,125.603 79.121,125.122 TEMP.1
PIN41: MIC.1 U1.41 | length 6.3
  Top Layer w0.254: U1.41 73.476,118.688 74.295,119.507 74.295,121.902 MIC.1
PIN42: MIC.4 U1.42 | length 13.4
  Top Layer w0.254: v2(70.739,124.968) 70.739,123.317 71.154,122.902 MIC.4 ; U1.42 73.076,119.283 73.279,119.486 v2(73.279,120.269)
  Bottom Layer w0.254: v2(70.739,124.968) 73.279,122.428 v2(73.279,120.269)
PIN43: MIC.2 U1.43 | length 8
  Top Layer w0.254: U1.43 72.676,118.927 72.263,119.34 72.263,120.904 73.279,121.92 73.279,122.682 73.499,122.902 MIC.2
PIN44: U1.44
PIN45: U1.45
PIN46: IC2.1 U1.46 | length 4.6
  Top Layer w0.254: IC2.1 69.089,119.827 71.476,117.44 U1.46
PIN47: U1.47 U7.1 | length 13.3
  Top Layer w0.254: U7.1 61.527,121.226 64.135,118.618 69.469,118.618 71.076,117.011 U1.47
TCK: P3.1 R1.2 U1.5 | length 21.7
  Top Layer w0.254: P3.1 54.421,115.824 R1.2 63.184,115.886 65.234,113.836 U1.5
TDI: P3.2 U1.6 | length 20.9
  Top Layer w0.254: P3.2 49.172,113.434 69.874,113.434 U1.6
TDO: P3.3 U1.7 | length 21.8
  Top Layer w0.254: P3.3 56.896,110.744 59.188,113.036 U1.7
TMS: P3.4 U1.4 | length 28.5
  Top Layer w0.254: P3.4 52.482,108.204 v2(53.625,109.347) ; v2(61.976,118.237) 65.977,114.236 U1.4
  Bottom Layer w0.254: v2(53.625,109.347) 53.625,112.553 59.309,118.237 v2(61.976,118.237)
VCC: C6.2 C7.2 C8.2 C12.2 C13.2 C14.2 C24.2 PWR1.A S1.3 U2.1 U2.3 U3.1 | length 39.1
  Top Layer w0.254: U2.3 U2.3@98.781,122.743 ; C14.2 C13.2 98.806,100.646 C12.2 C24.2 98.806,105.664 100.457,107.315 100.457,112.014 99.7,112.771 U3.1 98.9,114.779 C8.2 C6.2 C7.2 98.871,119.569 98.425,120.015 U2.1 98.875,120.843 99.441,121.409 99.441,122.083 U2.3@98.781,122.743 ; S1.3 106.964,125.637 102.638,125.637 PWR1.A 99.744,122.743 U2.3@98.781,122.743
VCC_BAT: B1.1 B1.2 C23.2 P2.1 S1.2 | length 72.4
  Top Layer w0.254: v2(104.902,97.409) 105.538,98.045 B1.2 ; B1.1 110.395,120.047 S1.2 110.395,124.746 111.286,125.637 116.809,125.637 C23.2
  Bottom Layer w0.254: P2.1 86.856,126.226 108.375,126.226 S1.2 110.395,102.902 v2(104.902,97.409)
pads on no net: ACC.2 ACC.3 ACC.5 ACC.10 ACC.15 MIC.6 S1.0 S1.1 TEMP.7 TEMP.V U2.4 U3.2 U3.3 U3.6 U3.7 U3.9 U3.V U5.1

## Polygon pours and split planes (outlines as drawn)
GND on Top Layer "Top Layer-GND" (solid, pour order 6): 47.752,127 47.752,96.266 119.761,96.266 119.761,127
GND on Bottom Layer "Bottom Layer-GND" (solid, pour order 8): 47.752,127 47.752,96.266 119.761,96.266 119.761,127
3V3 on VCC_3V3 (split plane): 119.251,96.776 58.166,96.776 58.166,106.045 48.262,106.045 48.262,117.602 60.071,117.602 60.071,126.49 119.251,126.49
1V2 on VCC_1V2 (split plane): 119.251,96.776 58.166,96.776 58.166,106.045 48.262,106.045 48.262,117.539 60.071,117.538 60.071,126.49 119.251,126.49

## Other copper
VCC_3V3 (plane layer: these items are gaps in the copper):
  region: 70.485,115.506 70.485,110.807 75.184,110.807 75.184,115.506
  region: 47.752,106.045 47.752,96.266 58.166,96.266 58.166,106.045
  region: 47.752,127.127 47.752,117.602 60.071,117.602 60.071,127.127
VCC_1V2 (plane layer: these items are gaps in the copper):
  region: 70.421,115.443 70.421,110.744 75.12,110.744 75.12,115.443
  region: 48.133,96.33 58.166,96.329 58.166,106.045 48.133,106.045
  region: 47.625,127.064 47.625,117.539 60.071,117.538 60.071,127.063

## Silkscreen, mask and mechanical layers (free items; w line width, h text height)
Top Overlay:
  text "VCC_BAT" at 82.677,122.682 h1
  text "JTAGSEL" at 87.122,122.682 h1
  text "GND" at 91.44,122.682 h1
  text "TCK" at 50.8,116.713 h1 r270
  text "TDI" at 50.8,114.046 h1 r270
  text "TDO" at 50.8,111.633 h1 r270
  text "TMS" at 50.8,108.966 h1 r270
  text "3V3" at 50.8,106.426 h1 r270
  text "GND" at 50.8,104.013 h1 r270
Mechanical 1:
  the board outline again, w0.254

## Text inside footprints (layer, text, board x,y; h text height)
B1: Mechanical 7 "Default Padstyle: r279_508" at 97.409,117.285 h1.27 r270; Mechanical 7 "1st Mtg Padstyle: c1778" at 95.504,116.333 h1.27 r270; Mechanical 7 "2nd Mtg Padstyle: c178h178" at 93.599,117.285 h1.27 r270; Mechanical 7 "3rd Mtg Padstyle: c178h178" at 91.694,117.285 h1.27 r270; Mechanical 7 "Left Mtg Padstyle: c152h76" at 89.789,117.285 h1.27 r270; Mechanical 7 "Right Mtg Padstyle: c152h76" at 87.884,117.603 h1.27 r270; Mechanical 7 "Alt Padstyle 1: b152_229h76" at 85.979,117.603 h1.27 r270; Mechanical 7 "Alt Padstyle 2: b229_152h76" at 84.074,117.603 h1.27 r270; Mechanical 7 "0.865in/21.97mm" at 121.92,127.889 h0.64 r270; Mechanical 7 "0in/0mm" at 127.635,110.141 h0.64 r270; Mechanical 7 "0.92in/23.368mm" at 130.175,111.411 h0.64 r270; Mechanical 7 "0in/0mm" at 110.045,94.298 h0.64 r270; Mechanical 7 "0in/0mm" at 110.045,126.301 h0.64 r270; Mechanical 7 "0.29in/7.365mm" at 113.728,136.779 h0.64 r270; Mechanical 7 "0.62in/15.748mm" at 109.536,135.826 h0.64 r270
J2: Mechanical 13 "PCB EDGE" at 45.562,96.828 h1
J3: Mechanical 13 "PCB EDGE" at 48.514,113.792 h1 r90